# EAGLE board circuit (EAGLE 9.7.0)

Size 302.95 x 119.95 mm. Coordinates in mm from the lower left corner, seen from the top.
Outline: 0,0 302.95,0 302.95,119.95 0,119.95 0,0
Copper layers (1*16): Top 0.035mm / dielectric 1.5mm / Bottom 0.035mm
Design rules "default": minimum track width 6mil, minimum drill 0.35mm, track to track 6mil, track to pad 6mil, pad to pad 6mil, via to via 6mil, smd to smd 6mil, copper to edge 40mil, drill to drill 6mil, minimum pad ring 10mil, minimum via ring 8mil, stop-mask expansion 4mil, vias tented up to drill 0mil, thermal gap 10mil

## Footprints (pad centres in the part's own frame; a part is rotated, then mirrored left to right if it is on the bottom)
DIODE-AXIAL = drill 1: 1 -5.08,0; 2 5.08,0
1X02 = drill 1.016 long: 1 -1.27,0; 2 1.27,0
BATTERY-GENERIC = drill 1.118 pad 3.15 octagon: + 2.54,0; - -2.54,0
PIEZO = drill 1 pad 1.6: 1 -3.5,0; 2 3.5,0
TO220V = drill 1.016 long: 1 -2.54,-2.54; 2 0,-2.54; 3 2.54,-2.54
RESAD1016W63L850D250B = drill 0.83 pad 1.43: 1 -5.08,0; 2 5.08,0
SWITCH-MOMENTARY-PTH-6.5MM = drill 1.016 pad 1.88: 1 -3.251,2.261; 2 3.251,2.261; 3 -3.251,-2.261; 4 3.251,-2.261
ARDUINO-UNO-R3-SHIELD = drill 1.016 pad 1.88: 3.3V 24.13,-2.54; 5V 24.13,0; A0 24.13,12.7; A1 24.13,15.24; A2 24.13,17.78; A3 24.13,20.32; A4 24.13,22.86; A5 24.13,25.4; AREF -24.13,-13.97; D2 -24.13,20.32; D3 -24.13,17.78; D4 -24.13,15.24; D5 -24.13,12.7; D6 -24.13,10.16; D7 -24.13,7.62; D8 -24.13,3.81; D9 -24.13,1.27; D10 -24.13,-1.27; D11 -24.13,-3.81; D12 -24.13,-6.35; D13 -24.13,-8.89; GND@0 24.13,2.54; GND@1 24.13,5.08; GND@2 -24.13,-11.43; IOREF 24.13,-7.62; NC 24.13,-10.16; RES 24.13,-5.08; RX -24.13,25.4; SCL -24.13,-19.05; SDA -24.13,-16.51; TX -24.13,22.86; VIN 24.13,7.62

## Placement (x,y rotation side)
D1  DIODEDIODE-AXIAL  [DIODE-AXIAL]  132.51,88.49 0 top
D2  DIODEDIODE-AXIAL  [DIODE-AXIAL]  218.87,88.49 0 top
D3  DIODEDIODE-AXIAL  [DIODE-AXIAL]  241.73,88.49 0 top
L12V_ARROW  LIGHTBULB  [1X02]  228.81,113.51 0 top
L12V_ARROW1  LIGHTBULB  [1X02]  251.78,113.68 0 top
LFLASH  LIGHTBULB  [1X02]  143.54,113.35 0 top
PA  BATTERYGENERIC  [BATTERY-GENERIC]  294.69,111.14 180 top
PIEZOBUZZER  PIEZO  [PIEZO]  184.58,78.33 0 top
Q1  TIP120_TO220-V  [TO220V]  127.43,91.03 0 top
Q2  TIP120_TO220-V  [TO220V]  213.79,91.03 0 top
Q3  TIP120_TO220-V  [TO220V]  236.65,91.03 0 top
R1  1k  [RESAD1016W63L850D250B]  262.05,65.63 90 top
R2  1k  [RESAD1016W63L850D250B]  246.81,65.63 90 top
R3  1k  [RESAD1016W63L850D250B]  201.09,65.63 90 top
R4  1k  [RESAD1016W63L850D250B]  152.83,65.63 90 top
S1  SWITCH_MOMENTARY  [SWITCH-MOMENTARY-PTH-6.5MM]  186.4,7.37 90 top
S2  SWITCH_MOMENTARY  [SWITCH-MOMENTARY-PTH-6.5MM]  221.96,7.37 90 top
S3  SWITCH_MOMENTARY  [SWITCH-MOMENTARY-PTH-6.5MM]  199.1,7.37 90 top
S4  SWITCH_MOMENTARY  [SWITCH-MOMENTARY-PTH-6.5MM]  211.8,7.37 90 top
UARDUINO_LEONARDO  ARDUINO-UNO-R3-SHIELD  [ARDUINO-UNO-R3-SHIELD]  47.88,83.26 270 top

## Library data of the parts
D1-D3 L12V_ARROW L12V_ARROW1 LFLASH PA PIEZOBUZZER Q1-Q3 R1-R4 S1-S4 UARDUINO_LEONARDO = Tinkercad

## Nets
L12V_ARROW1_2: D3.1 L12V_ARROW1.2 Q3.2
L12V_ARROW_2: D2.1 L12V_ARROW.2 Q2.2
LFLASH_2: D1.1 LFLASH.2 Q1.2
PA+: D1.2 D2.2 D3.2 L12V_ARROW1.1 L12V_ARROW.1 LFLASH.1 PA.+ UARDUINO_LEONARDO.VIN
PA-: PA.- PIEZOBUZZER.2 Q1.3 Q2.3 Q3.3 R1.1 R2.1 R3.1 R4.1 UARDUINO_LEONARDO.GND@0 UARDUINO_LEONARDO.GND@1 UARDUINO_LEONARDO.GND@2
UARDUINO_LEONARDO_5V: S1.3 S1.4 S2.3 S2.4 S3.3 S3.4 S4.3 S4.4 UARDUINO_LEONARDO.5V
UARDUINO_LEONARDO_D2: R2.2 S4.1 S4.2 UARDUINO_LEONARDO.D2
UARDUINO_LEONARDO_D3: R1.2 S2.1 S2.2 UARDUINO_LEONARDO.D3
UARDUINO_LEONARDO_D10: Q1.1 UARDUINO_LEONARDO.D10
UARDUINO_LEONARDO_D11: PIEZOBUZZER.1 UARDUINO_LEONARDO.D11
UARDUINO_LEONARDO_D12: Q2.1 UARDUINO_LEONARDO.D12
UARDUINO_LEONARDO_D13: Q3.1 UARDUINO_LEONARDO.D13
UARDUINO_LEONARDO_RX: R4.2 S1.1 S1.2 UARDUINO_LEONARDO.RX
UARDUINO_LEONARDO_TX: R3.2 S3.1 S3.2 UARDUINO_LEONARDO.TX

## Tracks (layer width: path | path; a pad name or v marks a point on that pad's centre or on a via)
L12V_ARROW1_2  (2 unrouted)
L12V_ARROW_2  (2 unrouted)
LFLASH_2  (2 unrouted)
PA+  (7 unrouted)
PA-  (11 unrouted)
UARDUINO_LEONARDO_5V  (8 unrouted)
UARDUINO_LEONARDO_D2  (3 unrouted)
UARDUINO_LEONARDO_D3  (3 unrouted)
UARDUINO_LEONARDO_D10  (1 unrouted)
UARDUINO_LEONARDO_D11  (1 unrouted)
UARDUINO_LEONARDO_D12  (1 unrouted)
UARDUINO_LEONARDO_D13  (1 unrouted)
UARDUINO_LEONARDO_RX  (3 unrouted)
UARDUINO_LEONARDO_TX  (3 unrouted)